# Altium PCB Gate_Driver_SMPS_V2.0_PCB.PcbDoc
Units mm, origin at the board's own origin, x right, y up, seen from the top; angles counter-clockwise.
Board outline 59.05 x 43.56 mm, 2 copper layers (Top Layer, Bottom Layer); 42 components, 33 nets, 133 pads, 20 vias.
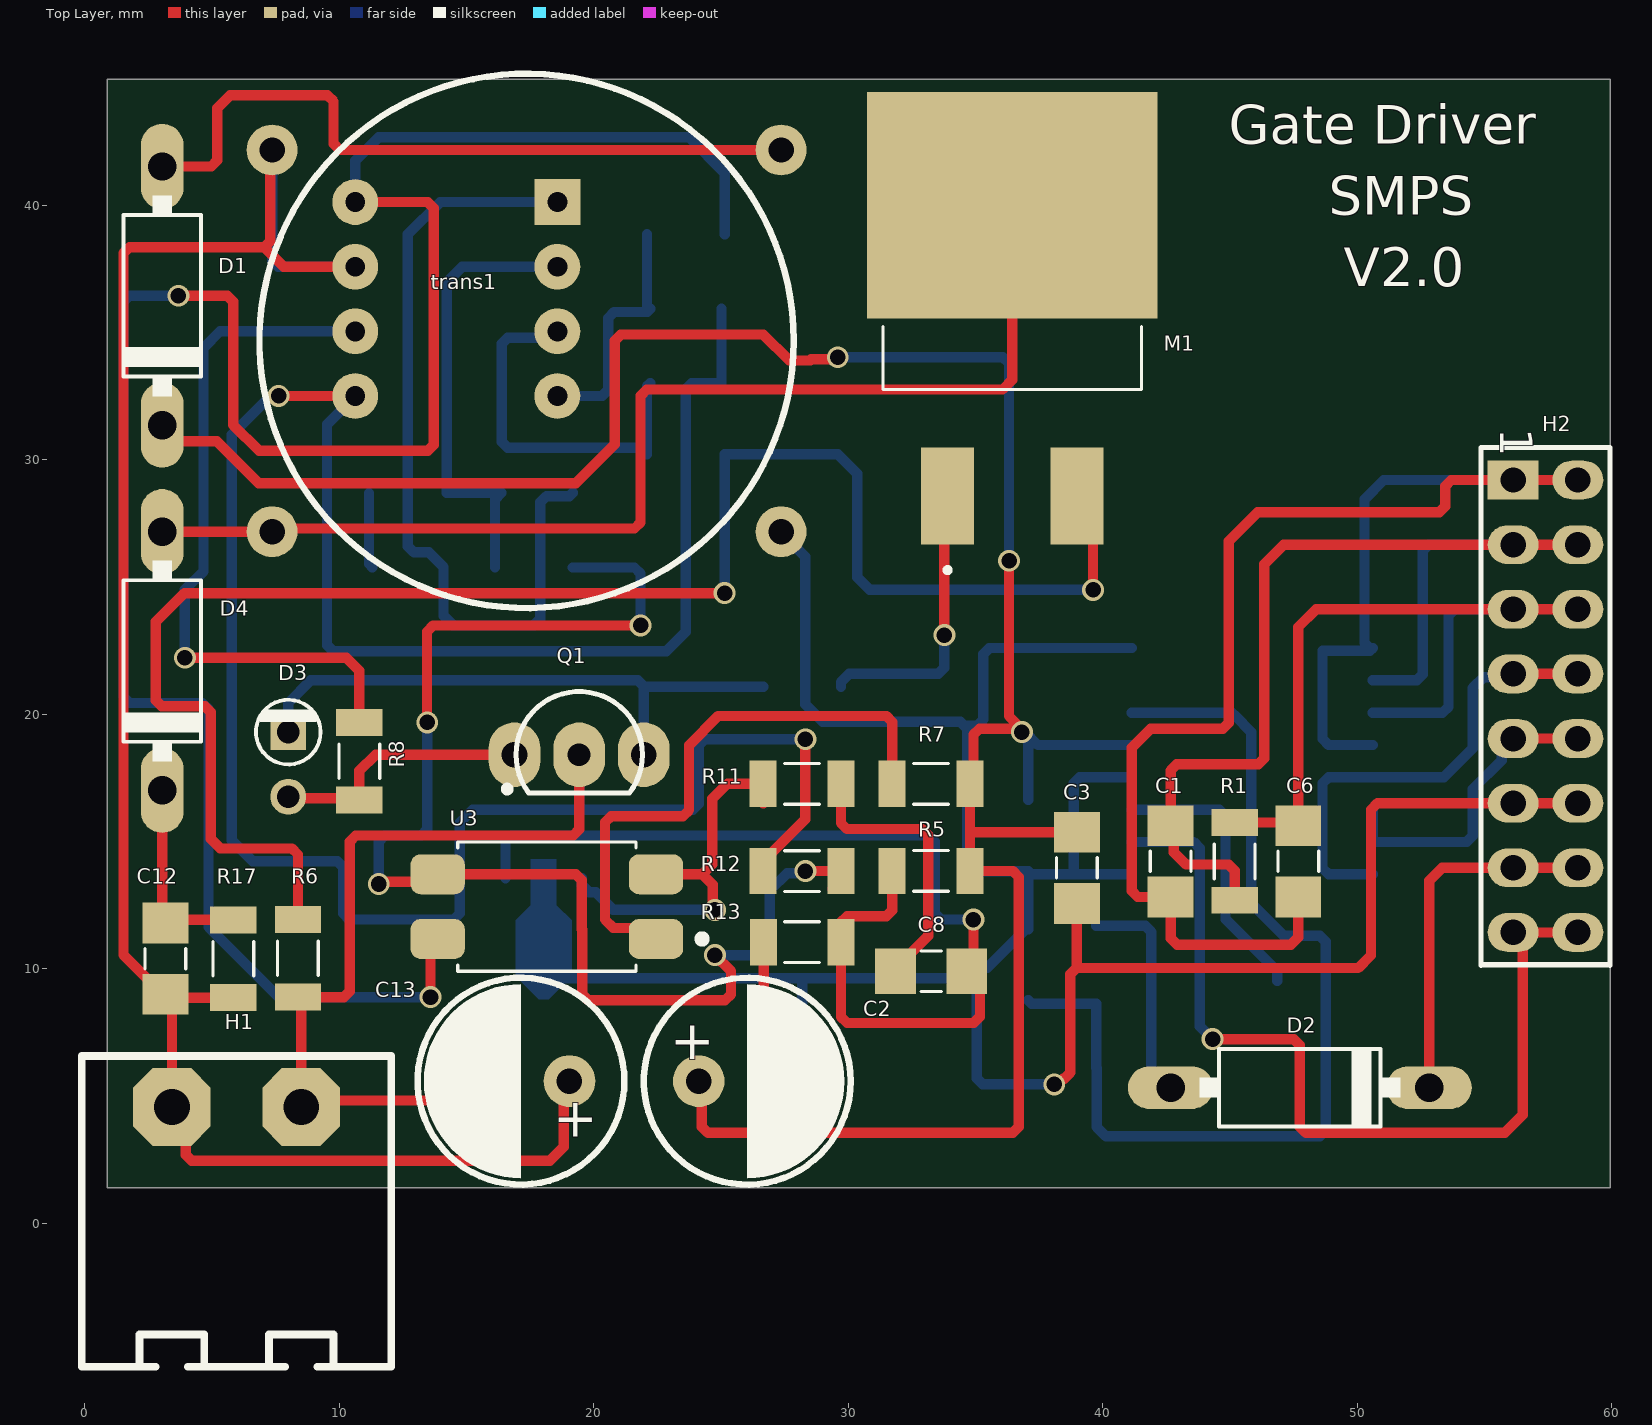
[diagram p0: Top Layer view]
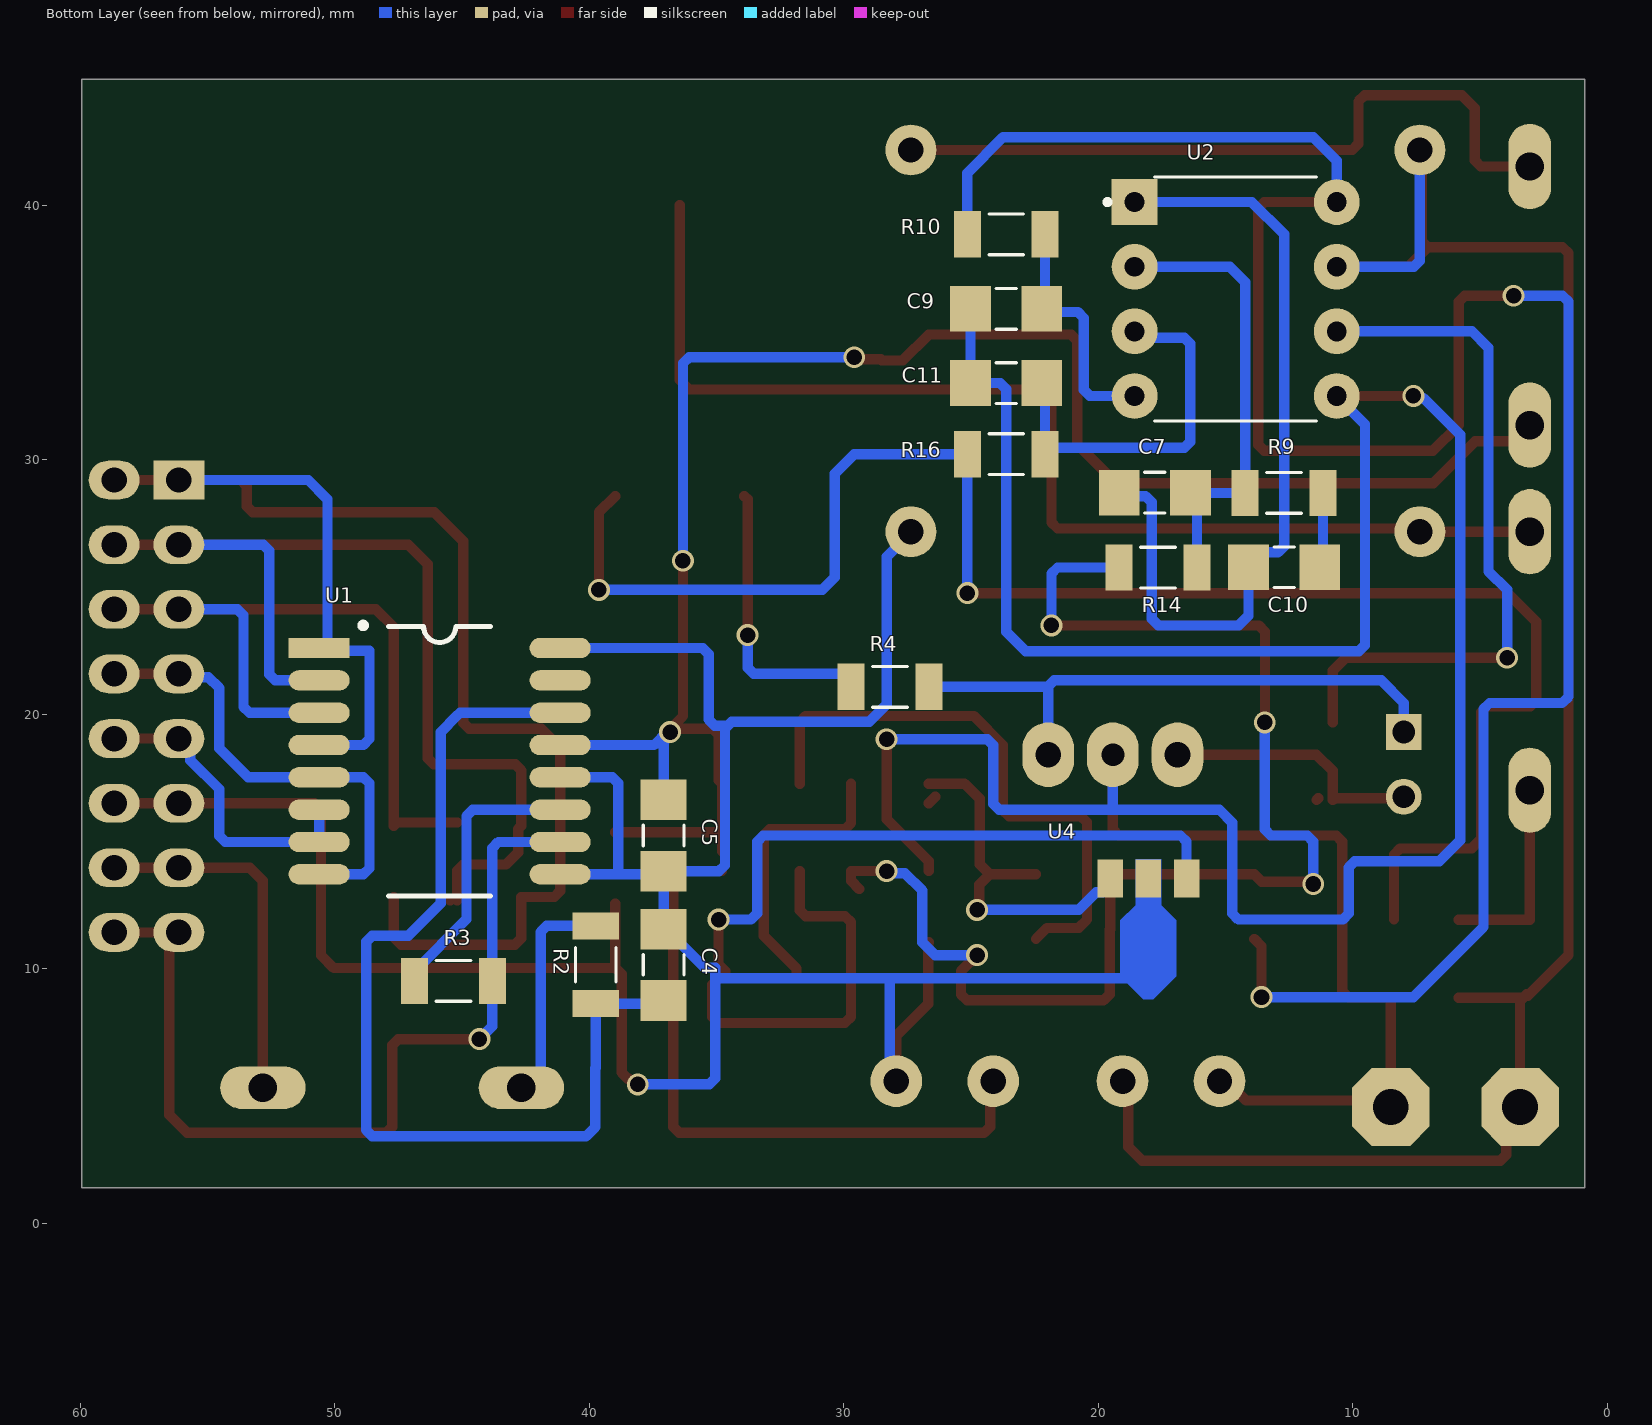
[diagram p1: Bottom Layer view, seen from below]
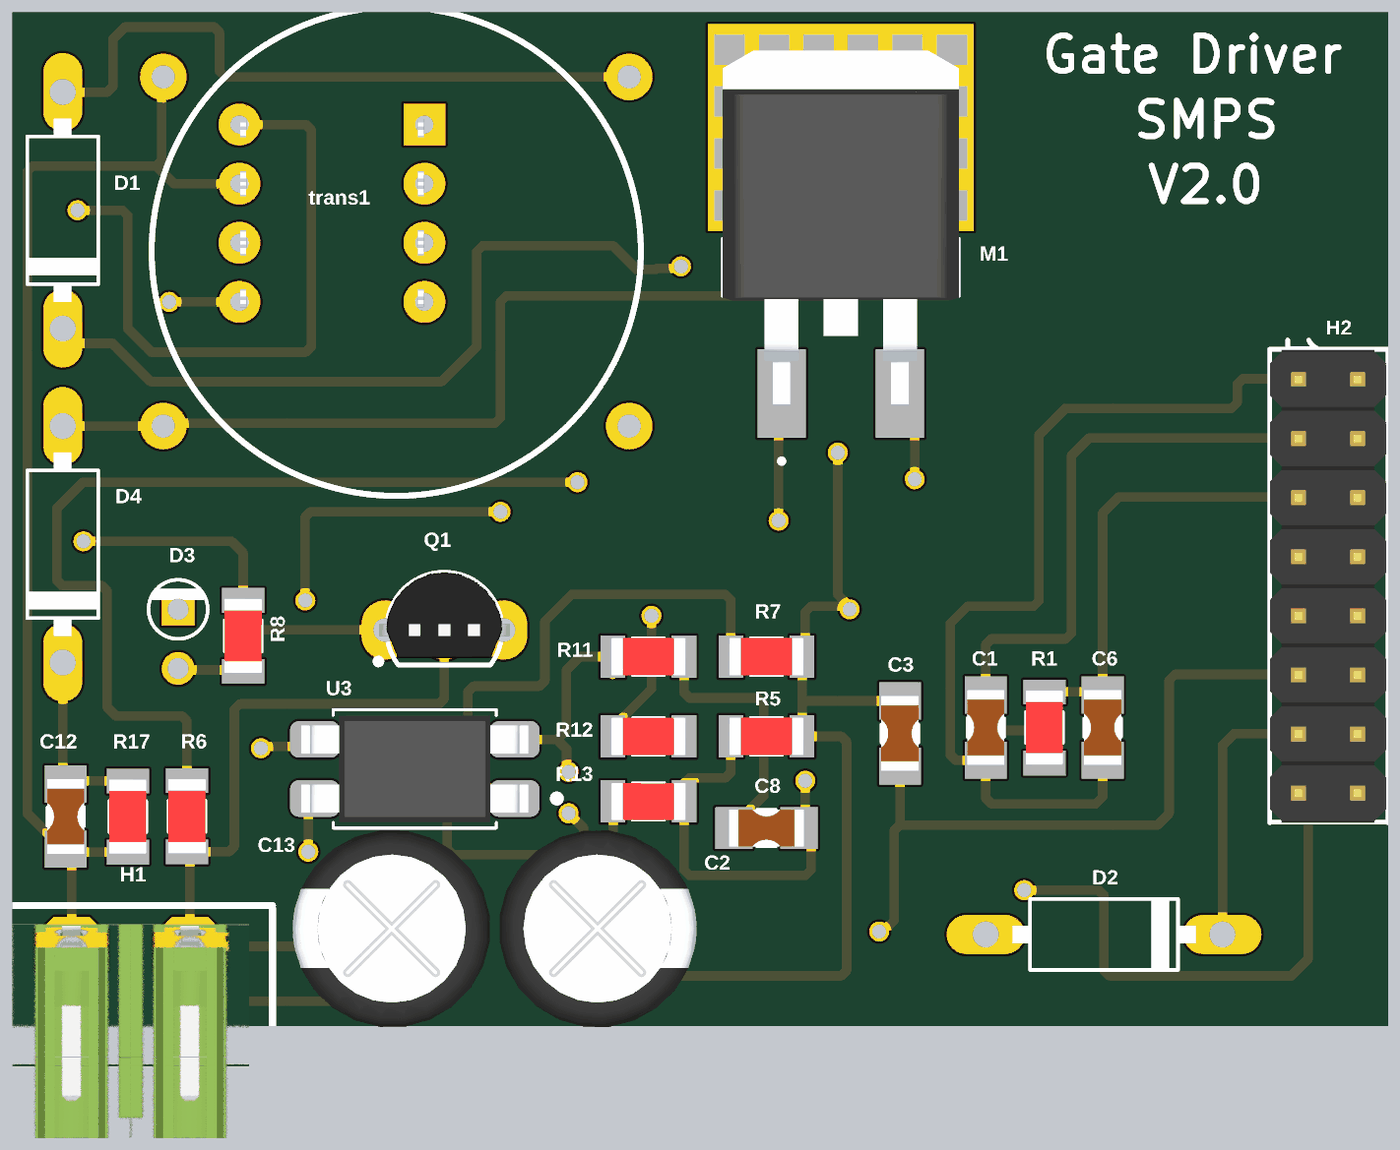
[diagram p2: 3D render of the assembled board from above, using the file's embedded part models]
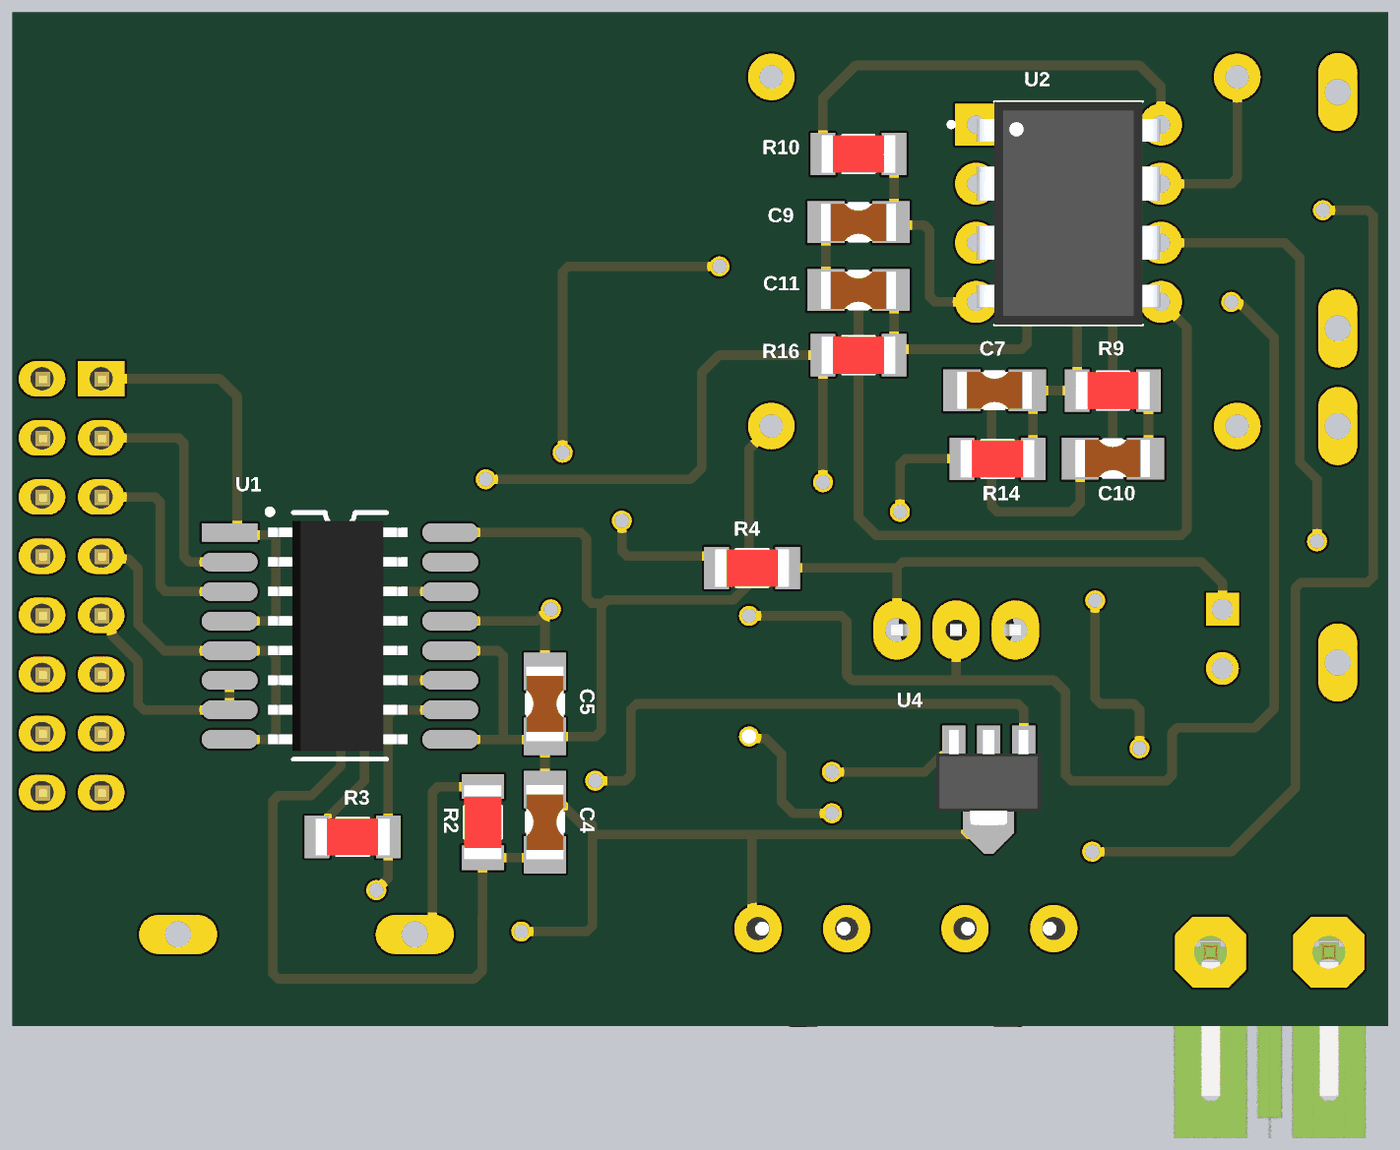
[diagram p3: 3D render of the assembled board from below, using the file's embedded part models]

## Layer stack, top to bottom
Top Solder: solder mask 0.0102, Solder Resist, Dk 3.5
Top Layer: signal copper 0.0356
Dielectric 1: dielectric 0.32, FR-4, Dk 4.8
Bottom Layer: signal copper 0.0356
Bottom Solder: solder mask 0.0102, Solder Resist, Dk 3.5

## Board outline
0.889,1.397 59.944,1.397 59.944,44.958 0.889,44.958

## Design rules (kind name [scope] priority, off if disabled: settings)
Clearance [All] p1: gap=0.254 ignorepadtopadclearanceinfootprint=FALSE except(0: Arc-Hole Track-Hole SMDPad-Hole THPad-Hole Via-Hole Fill-Hole Poly-Hole Region-Hole Text-Hole; 0.1: THPad-THPad; 0.381: Arc-THPad Track-THPad; 0.508: Arc-Arc Arc-Track Track-Track)
HoleSize [All] p1: absolutevalues=TRUE maxlimit=76.2 minlimit=0.3 maxpercent=80.000 minpercent=20.000
HoleToHoleClearance [All] p1: gap=0.025 allowstackedmicrovias=TRUE
PolygonConnect [All] p1: connectstyle=Relief reliefconductorwidth=0.254 reliefentries=4 polygonreliefangle="90 Angle" airgapwidth=0.254
RoutingVias [All] p1: holewidth=0.61 width=0.859 viastyle="Through Hole" minholewidth=0.61 minwidth=0.859 maxholewidth=0.8 maxwidth=0.864
SolderMaskExpansion [All] p1: expansion=0.102 istentingtop=FALSE
Width [All] p1: maxlimit=0.813 minlimit=0.406 preferedwidth=0.508
28 further rules are at their usual default settings.

## Components (designator, comment, footprint, x,y, rotation, side; value= is the part's Value field where it differs from the comment)
C1 "0.1u" CAP_1206 42.672,14.224 r270 top
C2 "470u-50v" CAP-1.5 24.13,5.586 r0 top
C3 "100p" CAP_1206 38.989,13.97 r270 top
C4 "0.1u" CAP_1206 37.084,10.16 r90 bottom
C5 "0.1u" CAP_1206 37.084,15.24 r270 bottom
C6 "1n" CAP_1206 47.691,14.224 r270 top
C7 "10nAC" CAP_1206 17.78,28.712 r0 bottom
C8 "10n" CAP_1206 33.259,9.906 r0 top
C9 "13.6n" CAP_1206 23.622,35.936 r180 bottom
C10 "10nAC" CAP_1206 12.703,25.781 r0 bottom
C11 "100pf" CAP_1206 23.622,33.02 r180 bottom
C12 "3.3n" CAP_1206 3.175,10.399 r270 top
C13 "470u-50v" CAP-1.5 19.05,5.588 r180 top
D1 "BA157-E3/54" P1-10 3.048,36.449 r90 top
D2 "BA157-E3/54" P1-10 47.752,5.334 r180 top
D3 "1N5817" DO41-1 8.001,18.034 r270 top
D4 "BA157-E3/54" P1-10 3.048,22.098 r90 top
H1 "PS-IN" "TB2 - V" 3.429,4.572 r0 top
H2 "H2*8" HDR2X8 56.134,29.21 r270 top
M1 "IRF540N" IRF540N_SMD 36.449,35.56 r90 top
Q1 "B772-PNP" "TO-92A - DUPLICATE" 19.431,18.415 r270 top
R1 "4.7K" RES_1206 45.191,14.224 r270 top
R2 "100" RES_1206 39.751,10.16 r270 bottom
R3 "8.2" RES_1206 45.339,9.525 r180 bottom
R4 "20" RES_1206 28.19,21.082 r180 bottom
R5 "13.5K" RES_1206 33.259,13.848 r0 top
R6 "0.25/4W" RES_1206 8.382,10.414 r90 top
R7 "1K" RES_1206 33.259,17.272 r0 top
R8 "47" RES_1206 10.795,18.161 r90 top
R9 "11.2K" RES_1206 12.703,28.702 r180 bottom
R10 "600-POTENTIO" RES_1206 23.622,38.862 r0 bottom
R11 "16K" RES_1206 28.19,17.272 r0 top
R12 "1K" RES_1206 28.19,13.843 r0 top
R13 "2.5K" RES_1206 28.194,11.049 r0 top
R14 "5.6K" RES_1206 17.653,25.771 r0 bottom
R16 "42K" RES_1206 23.622,30.226 r0 bottom
R17 "510" RES_1206 5.842,10.399 r270 top
trans1 "C055928A" C055928A 7.366,27.178 r0 top
U1 "FOD8332" "SO16 - W" 50.618,22.606 r180 bottom
U2 "UC3843BN" DIP794W45P254L959H508Q8 14.605,36.322 r180 bottom
U3 "PC817" PC816_SMD 18.161,12.446 r180 top
U4 "TL431" VREG_TL431IPK 18.034,11.557 r0 bottom

## Footprints (in the part's own frame and the unit in brackets; to place one, negate y for a bottom-side part, rotate by r counter-clockwise, add the part's x,y. Pads: shape width x height; smd on the part's side, far side on the other; paste and mask are expansions set on the pad)
C055928A [mm]
  round 2 hole 1: 1(0,0) 2(0,15) 3(20,0) 4(20,15)
  silkscreen extent -0.5,-3 20.5,18
CAP-1.5 [mil]
  round 80 hole 39.37: 1(0,0) 2(150,0)
  silkscreen extent -85,-160 235,160, body extent -93,-167 241,167, height 551
CAP_1206 [mm]
  rect 1.6x1.8 smd: 1(-1.4,0) 2(1.4,0)
  silkscreen extent -0.4,-0.8 0.4,0.8, body extent -1.6,-0.8 1.6,0.8, height 1.5
DIP794W45P254L959H508Q8 [mm]
  rect 1.8x1.8 hole 0.78: 1(-3.97,3.81) 1(-3.97,3.81)
  round 1.8 hole 0.78: 2(-3.97,1.27) 2(-3.97,1.27) 3(-3.97,-1.27) 3(-3.97,-1.27) 4(-3.97,-3.81) 4(-3.97,-3.81) 5(3.97,-3.81) 5(3.97,-3.81) 6(3.97,-1.27) 6(3.97,-1.27) 7(3.97,1.27) 7(3.97,1.27) 8(3.97,3.81) 8(3.97,3.81)
  silkscreen extent -5.13,-4.79 3.18,4.79, body extent -3.94,-4.79 3.94,4.79, height 4.58
DO41-1 [mm]
  round 1.408 hole 0.9: A(1.27,0)
  rect 1.408x1.408 hole 0.9: C(-1.27,0)
  silkscreen extent -2.54,-1.27 0,1.27
HDR2X8 [mm] "Connector; Header; 4x2 Position"
  oval 1.524x2 hole 1: 1(0,2.54) 2(2.54,2.54) 2(2.54,0) 3(5.08,2.54) 3(5.08,0) 4(7.62,0) 4(7.62,2.54) 5(10.16,0) 5(10.16,2.54) 6(12.7,0) 6(12.7,2.54) 7(15.24,0) 7(15.24,2.54) 8(17.78,0) 8(17.78,2.54)
  rect 1.524x2 hole 1: 1(0,0)
  silkscreen extent -1.27,-1.27 19.08,3.81, body extent -1.24,-1.27 19.08,3.73, height 8.6
IRF540N_SMD [mm]
  rect 8.89x11.43 smd paste-7: D(4.445,0)
  rect 3.81x2.08 smd: G(-6.985,2.54) S(-6.985,-2.54)
  silkscreen extent -9.99,-5.08 -0.32,5.08, body extent -7.49,-5.08 7.75,5.08, height 4.83
P1-10 [mil]
  oval 132x66 hole 44: A(200,0) C(-200,0)
  silkscreen extent -155,-60 155,60
PC816_SMD [mm]
  rrect50% 2.13x1.57 smd: 1(-4.29,1.27) 2(-4.29,-1.27) 3(4.29,-1.27) 4(4.29,1.27)
  silkscreen extent -6.25,-2.54 3.5,2.54, body extent -4.87,-2.29 4.87,2.29, height 4
RES_1206 [mm]
  rect 1.06x1.82 smd: 1(-1.528,0) 2(1.528,0)
  silkscreen extent -0.68,-0.8 0.68,0.8, body extent -1.6,-0.8 1.6,0.8, height 0.7
"SO16 - W" [mm]
  rect 2.4x0.8 smd: 1(0,0)
  oval 2.4x0.8 smd: 2(0,-1.27) 3(0,-2.54) 4(0,-3.81) 5(0,-5.08) 6(0,-6.35) 7(0,-7.62) 8(0,-8.89) 9(9.47,-8.89) 10(9.47,-7.62) 11(9.47,-6.35) 12(9.47,-5.08) 13(9.47,-3.81) 14(9.47,-2.54) 15(9.47,-1.27) 16(9.47,0)
  silkscreen extent 1.63,-9.74 6.73,0.99, body extent 1.65,-9.39 7.65,0.51, height 1.4
"TB2 - V" [mil] "Terminal Block Vertical"
  oct 120x120 hole 55.12: 1(0,0) 2(200,0)
  silkscreen extent -139,-402 339,79, body extent -100,-315 300,47, height 283
"TO-92A - DUPLICATE" [mil] "TO, Flat Index; 3 In-Line, Axial Leads; Body Dia. 4.5mm; Leads 0.51 x 0.48 mm (max)"
  oval 100x80 hole 40: B(0,-100) E(0,100)
  oval 100x80 hole 35.43: C(0,0)
  silkscreen extent -98,-116 59,98, body extent -98,-110 47,110, height 316
VREG_TL431IPK [mm]
  rect 1x1.5 smd paste-2 mask+0: A(0,-2)
  rect 1x1.5 smd: C(1.5,-2) R(-1.5,-2)
  Top Layer region: 1.1,1.85 1.1,-0.35 0.5,-0.95 0.5,-2.75 -0.5,-2.75 -0.5,-0.95 -1.1,-0.35 -1.1,1.85 -0.2,2.75 0.2,2.75
  body extent -2.25,-2.56 2.25,1.54, height 1.6

## Part data
C1 C2 C3 C4 C5 C6 C13: library part CAP-DC
C7 C8 C9 C10 C11 C12: library part CAP-AC
D1 D2 D4: "Diode 400V 1A Fast Switching DO-204AL", Average Rectified Current=1A, Case/Package=DO-204AL, Forward Voltage=1.3V, Manufacturer="Vishay Semiconductors", Max Operating Temperature=125°C, Max Repetitive Reverse Voltage (Vrrm)=400V, Max Reverse Current=5uA, Max Surge Current=20A, Min Operating Temperature=-65°C, Package Quantity=1, Supplier Part Number 1=625-BA157-E3, ComponentLink1Description=http://www.vishay.com/docs/88536/ba157.pdf?src-supplier=Newark, ComponentLink1URL=http://www.vishay.com/docs/88536/ba157.pdf?src-supplier=Newark, ComponentLink2Description=http://www.vishay.com/docs/88536/ba157.pdf?src-supplier=Avnet, ComponentLink2URL=http://www.vishay.com/docs/88536/ba157.pdf?src-supplier=Avnet, ComponentLink3Description=http://components.arrow.com/part/dataview/42811334S9655183N5680?src-supplier=Arrow+Electronics, ComponentLink3URL=http://components.arrow.com/part/dataview/42811334S9655183N5680?src-supplier=Arrow+Electronics, ComponentLink4Description=http://www.vishay.com/docs/88536/ba157.pdf?src-supplier=Future+Electronics, ComponentLink4URL=http://www.vishay.com/docs/88536/ba157.pdf?src-supplier=Future+Electronics, ComponentLink5Description=http://www.vishay.com/docs/88536/ba157.pdf?src-supplier=Avnet+Europe, ComponentLink5URL=http://www.vishay.com/docs/88536/ba157.pdf?src-supplier=Avnet+Europe, Contact Plating=Tin,Matte, Element Configuration=Single, Forward Current=1A, Lead Free="Lead Free", Manufacturer Part Number=BA157-E3/54, Max Reverse Voltage (DC)=400V, Mount="Through Hole", Number of Pins=2, Packaging="Tape and Reel", Peak Non-Repetitive Surge Current=20A, Pricing 1="1=0.27, 10=0.226, 50=0.226, 100=0.12, 500=0.079, 1000=0.054, 2500=0.043, 5500=0.035, 10000=0.035, 22000=0.033, 49500=0.03 (USD)", Radiation Hardening=No, Recovery Time=150ns, Reverse Recovery Time=150ns, Reverse Recovery Time-Max=150ns, Reverse Voltage=400V, RoHS Compliant=Yes, Stock 1=18564, Supplier 1=Mouser
D3: "Lite-On 1N5817, Schottky Diode, 20V 3A, 2-Pin DO-201AD", Average Rectified Current=3A, Case/Package=DO-201AD, Forward Voltage=850mV, Manufacturer=Vishay, Manufacturer Part Number=1N5820, Max Forward Surge Current (Ifsm)=80A, Max Operating Temperature=125°C, Max Repetitive Reverse Voltage (Vrrm)=20V, Max Reverse Current=150uA, Max Reverse Leakage Current=2mA, Min Operating Temperature=-65°C, Supplier Part Number 1=700-9899, ComponentLink1Description=http://www.liteon-semi.com/download.php?hSFile=1N5820-1N5822-5.pdf&hDFile=tecfile01312524214.pdf&src-supplier=Avnet+Asia, ComponentLink1URL=http://www.liteon-semi.com/download.php?hSFile=1N5820-1N5822-5.pdf&hDFile=tecfile01312524214.pdf&src-supplier=Avnet+Asia, ComponentLink2Description=http://docs-usa.electrocomponents.com/techlib:/itc_doclist_US.htm?stockno=7009899&src-supplier=Allied+Electronics, ComponentLink2URL=http://docs-usa.electrocomponents.com/techlib:/itc_doclist_US.htm?stockno=7009899&src-supplier=Allied+Electronics, Element Configuration=Single, Forward Current=3A, Height=5.3mm, Length=9.5mm, Max Surge Current=80A, Mount="Through Hole", Number of Pins=2, Packaging=Bulk, Peak Non-Repetitive Surge Current=80A, Radiation Hardening=No, RoHS Compliant=No, Stock 1=0, Supplier 1=RSComponents, Width=5.3mm
H1: library part PS-plug
H2: library part "Header 8X2"
M1: "Mosfet, Power; N-ch; Vdss 100V; Rds(on) 44MILLIOHMS; Id 33A; TO-220AB; Pd 130W; -55DEG", Case/Package=TO-220AB, Continuous Drain Current (ID)=33A, Gate to Source Voltage (Vgs)=20V, Manufacturer="International Rectifier", Max Operating Temperature=175°C, Min Operating Temperature=-55°C, Power Dissipation=130W, Supplier Part Number 1=IRF540NPBF-TUBE, ComponentLink1Description=http://www.produktinfo.conrad.com/datenblaetter/150000-174999/162412-da-01-en-IRF_540_N.pdf?src-supplier=Conrad, ComponentLink1URL=http://www.produktinfo.conrad.com/datenblaetter/150000-174999/162412-da-01-en-IRF_540_N.pdf?src-supplier=Conrad, Manufacturer Part Number=IRF540N, Mount="Through Hole", Number of Elements=1, Number of Pins=3, RoHS Compliant=No, Stock 1=0, Supplier 1="Future Electronics"
R1 R2 R3 R4 R5 R6 R7 R8 R9 R10 R11 R12 R13 R14 R16 R17: library part RES
trans1: library part "flyback trans"
U1: library part TLP5214A
U2: "IC REG CTRLR BST/FLYBK 8-MINIDIP", Case/Package=PDIP, Frequency=250kHz, Manufacturer=STMicroelectronics, Max Frequency=500kHz, Max Operating Temperature=150°C, Max Power Dissipation=800mW, Max Supply Current=17mA, Max Supply Voltage=30V, Min Operating Temperature=-40°C, Min Supply Voltage=12V, Output Current=1A, Output Voltage=5.1V, Package Quantity=50, ComponentLink1Description=http://www.st.com/content/ccc/resource/technical/document/datasheet/b6/e8/cc/ba/4f/cd/42/9b/CD00000966.pdf/files/CD00000966.pdf/jcr:content/translations/en.CD00000966.pdf?src-supplier=Digi-Key, ComponentLink1URL=http://www.st.com/content/ccc/resource/technical/document/datasheet/b6/e8/cc/ba/4f/cd/42/9b/CD00000966.pdf/files/CD00000966.pdf/jcr:content/translations/en.CD00000966.pdf?src-supplier=Digi-Key, ComponentLink2Description=http://www.mouser.com/ds/2/389/uc2842b-974450.pdf?src-supplier=Mouser, ComponentLink2URL=http://www.mouser.com/ds/2/389/uc2842b-974450.pdf?src-supplier=Mouser, ComponentLink3Description=http://www.st.com/web/en/resource/technical/document/datasheet/CD00000966.pdf?src-supplier=Avnet, ComponentLink3URL=http://www.st.com/web/en/resource/technical/document/datasheet/CD00000966.pdf?src-supplier=Avnet, ComponentLink4Description=http://www.st.com/web/en/resource/technical/document/datasheet/CD00000966.pdf?src-supplier=Future+Electronics, ComponentLink4URL=http://www.st.com/web/en/resource/technical/document/datasheet/CD00000966.pdf?src-supplier=Future+Electronics, ComponentLink5Description=https://www.verical.com/server-webapp/html/getDatasheet?partID=66041&src-supplier=Verical, ComponentLink5URL=https://www.verical.com/server-webapp/html/getDatasheet?partID=66041&src-supplier=Verical, ComponentLink6Description=http://www.produktinfo.conrad.com/datenblaetter/1100000-1199999/001185662-da-01-en-IC_REG_CTRLR_PWM_CM_UC3843BN_DIP_8_STM.pdf?src-supplier=Conrad, ComponentLink6URL=http://www.produktinfo.conrad.com/datenblaetter/1100000-1199999/001185662-da-01-en-IC_REG_CTRLR_PWM_CM_UC3843BN_DIP_8_STM.pdf?src-supplier=Conrad, Duty Cycle=100%, Fall Time=50ns, Height=3.32mm, Lead Free="Lead Free", Length=10.92mm, Manufacturer Part Number=UC3843BN, Max Duty Cycle=100%, Mount="Through Hole", Number of Outputs=1, Number of Pins=8, Packaging=Rail/Tube, Power Dissipation=800mW, Pricing 1="1=0.9063, 10=0.7523, 25=0.7389, 100=0.6172, 250=0.5737, 500=0.4903, 1000=0.3493, 4000=0.3129, 5000=0.3123, 6000=0.3104, 8000=0.3085, 10000=0.3066, 20000=0.3047, 25000=0.3027, 30000=0.3008, 50000=0.2988 (USD)", Radiation Hardening=No, REACH SVHC="No SVHC", Rise Time=50ns, RoHS Compliant=Yes, Series=-, Stock 1=669, Supplier 1="Arrow Electronics", Supplier Part Number 1=UC3843BN, Switching Frequency=500kHz, Topology=Boost,Flyback, Weight=0.032805oz, Width=6.6mm
U3: "Optocoupler DC-IN 1-CH Transistor DC-OUT 4-Pin PDIP Sleeve", Case/Package=PDIP, Collector Emitter Saturation Voltage=200mV, Collector Emitter Voltage (VCEO)=35V, Current Transfer Ratio=600%, Forward Current=50mA, Forward Voltage=1.4V, Manufacturer=Sharp, Max Operating Temperature=100°C, Min Operating Temperature=-30°C, Power Dissipation=200mW, Reverse Breakdown Voltage=6V, Fall Time=18000ns, Input Type=DC, Manufacturer Part Number=PC817, Mount="Through Hole", Number of Elements=1, Number of Pins=4, Packaging=Sleeve, Rise Time=18000ns, RoHS Compliant=No, Stock 1=0, Supplier 1="Arrow Electronics", Supplier Part Number 1=PC817
U4: library part TL431CZ, "V-Ref Adjustable 2.495V to 36V 100mA 3-Pin TO-92 Bulk", Case/Package=TO-92, Cathode Current=1mA, Manufacturer=STMicroelectronics, Max Input Voltage=37V, Max Operating Temperature=70°C, Max Output Current=100mA, Max Output Voltage=36V, Min Operating Temperature=0°C, Min Output Voltage=2.495V, Package Quantity=1, Temperature Coefficient=100ppm/°C, Tolerance=2.21%, Accuracy=2%, ComponentLink1Description=http://www.st.com/web/en/resource/technical/document/datasheet/CD00000986.pdf?src-supplier=Digi-Key, ComponentLink1URL=http://www.st.com/web/en/resource/technical/document/datasheet/CD00000986.pdf?src-supplier=Digi-Key, ComponentLink2Description=http://www.st.com/content/ccc/resource/technical/document/datasheet/2d/27/af/41/03/e2/44/8e/CD00000986.pdf/files/CD00000986.pdf/jcr:content/translations/en.CD00000986.pdf?src-supplier=Digi-Key, ComponentLink2URL=http://www.st.com/content/ccc/resource/technical/document/datasheet/2d/27/af/41/03/e2/44/8e/CD00000986.pdf/files/CD00000986.pdf/jcr:content/translations/en.CD00000986.pdf?src-supplier=Digi-Key, ComponentLink3Description=http://www.farnell.com/datasheets/1690313.pdf?src-supplier=Element14, ComponentLink3URL=http://www.farnell.com/datasheets/1690313.pdf?src-supplier=Element14, ComponentLink4Description=http://www.rapidonline.com/pdf/82-0290.pdf?src-supplier=Rapid+Electronics, ComponentLink4URL=http://www.rapidonline.com/pdf/82-0290.pdf?src-supplier=Rapid+Electronics, ComponentLink5Description=https://www.verical.com/server-webapp/html/getDatasheet?partID=98639&src-supplier=Verical, ComponentLink5URL=https://www.verical.com/server-webapp/html/getDatasheet?partID=98639&src-supplier=Verical, ComponentLink6Description=http://www.produktinfo.conrad.com/datenblaetter/150000-174999/155641-da-01-en-SPG_REF_TL431CZ_STM.pdf?src-supplier=Conrad, ComponentLink6URL=http://www.produktinfo.conrad.com/datenblaetter/150000-174999/155641-da-01-en-SPG_REF_TL431CZ_STM.pdf?src-supplier=Conrad, Height=4.4mm, Lead Free="Lead Free", Length=4.7mm, Manufacturer Part Number=TL431CZ, Mount="Through Hole", Nominal Supply Current=1mA, Number of Channels=1, Number of Pins=3, Output Current=100mA, Output Type=Adjustable, Output Voltage=36V, Packaging=Bulk, Pricing 1="1=0.4405, 10=0.3422, 100=0.2291, 500=0.1883, 1000=0.1722, 2500=0.1137, 10000=0.083, 1=0.3921, 10=0.3046, 100=0.2039, 500=0.1676, 1000=0.1299, 2500=0.1012, 10000=0.0723 (USD)", Radiation Hardening=No, REACH SVHC="No SVHC", Reference Type=Shunt,Adjustable, Reference Voltage=36V, RoHS Compliant=Yes, Series=-, Stock 1=5333, Supplier 1="Arrow Electronics", Supplier Part Number 1=TL431CZ, Supply Current=1mA, Weight=0.01lb, Width=3.7mm

## Via types
v1: diameter 0.859, hole 0.61, Top Layer to Bottom Layer, 20 vias

## Nets (pads, with @x,y where several pads share a name; then routed paths per layer and width w, separated by ;. In a path a pad name is that pad's centre, name@x,y a point inside that pad or via, vN(x,y) a via of type N, cw(c..) or ccw(c..) an arc to the next point about the centre after c; other vN are vias at no path point)
C: D2.C H2.7 | length 14.2
  Top Layer w0.406: D2.C 52.832,13.462 53.34,13.97 56.134,13.97 H2.7@58.674,13.97
F: C6.1 H2.3 R1.1 U1.3 | length 30.9
  Top Layer w0.406: R1.1 47.563,15.752 C6.1 47.691,23.434 48.387,24.13 56.134,24.13 H2.3@58.674,24.13
  Bottom Layer w0.406: U1.3 53.356,20.066 53.594,20.304 53.594,23.892 53.832,24.13 H2.3@56.134,24.13
G: H2.8 R3.2 U1.10 | length 36.2
  Top Layer w0.406: v1(44.323,7.239) 47.514,7.239 47.752,7.001 47.752,3.794 47.99,3.556 55.797,3.556 56.515,4.274 56.515,11.049 56.134,11.43 H2.8@58.674,11.43
  Bottom Layer w0.406: U1.10 43.573,14.986 43.811,14.748 R3.2 43.811,7.751 v1(44.323,7.239)
GNDK: H2.4 U1.5 U1.8 | length 18.7
  Top Layer w0.406: H2.4@56.134,21.59 H2.4@58.674,21.59
  Bottom Layer w0.406: U1.8 48.879,13.716 48.641,13.954 48.641,17.288 48.879,17.526 U1.5 53.414,17.526 54.55,18.662 54.55,21.038 54.975,21.463 56.007,21.463 56.134,21.59 H2.4@56.077,21.59
Isns: M1.S R6.2 R16.2 | length 67.9
  Top Layer w0.406: R6.2 8.382,14.494 8.144,14.732 5.334,14.732 4.953,15.113 4.953,20.082 4.715,20.32 3.032,20.32 2.794,20.558 2.794,23.638 3.921,24.765 v1(25.146,24.765) ; M1.S 39.624,27.94 v1(39.624,24.892)
  Bottom Layer w0.406: v1(25.146,24.765) 25.148,24.767 25.148,30.224 R16.2 29.591,30.226 30.353,29.464 30.353,25.384 30.845,24.892 v1(39.624,24.892)
NetC4_1: C4.1 R2.2 U1.14 | length 39.5
  Bottom Layer w0.406: C4.1 37.212,8.632 R2.2 39.751,6.119 39.776,6.094 39.776,3.785 40.132,3.429 48.53,3.429 48.768,3.667 48.768,11.065 48.53,11.303 47.117,11.303 45.847,12.573 45.847,19.304 45.212,19.939 45.085,20.066 U1.14
NetC7_1: C7.1 R9.1 R14.1 U2.2 | length 18.1
  Bottom Layer w0.406: R14.1 16.125,28.457 C7.1@16.37,28.702 ; C7.1 C7.1@16.37,28.702 ; U2.2@18.575,37.592 14.843,37.592 14.231,36.98 R9.1 C7.1@16.37,28.702
NetC7_2: C7.2 C10.2 U2.1 | length 32.4
  Bottom Layer w0.406: U2.1@18.575,40.132 13.97,40.132 12.7,38.862 12.7,26.603 12.938,26.365 13.519,26.365 C10.2 14.103,23.87 14.478,23.495 17.653,23.495 17.907,23.749 17.907,28.337 18.145,28.575 19.043,28.575 C7.2
NetC8_1: C8.1 R11.2 | length 11
  Top Layer w0.406: R11.2 29.718,15.732 29.956,15.494 32.909,15.494 33.147,15.256 33.147,11.294 31.859,10.006 C8.1
NetC8_2: C8.2 R5.1 R13.2 U4.R | length 40.2
  Top Layer w0.406: R5.1 31.731,12.303 31.493,12.065 29.956,12.065 29.718,11.827 29.718,9.906 29.718,8.112 29.956,7.874 34.941,7.874 35.179,8.112 35.179,9.386 C8.2 34.925,10.172 v1(34.925,11.938)
  Bottom Layer w0.406: U4.R 16.534,15.002 16.772,15.24 33.163,15.24 33.401,15.002 33.401,12.192 33.655,11.938 v1(34.925,11.938)
NetC9_2: C9.2 R10.1 U2.4 | length 9.7
  Bottom Layer w0.406: U2.4@18.575,32.512 20.336,32.512 20.574,32.75 20.574,35.576 20.812,35.814 22.1,35.814 C9.2 22.094,36.064 R10.1
NetC10_1: C10.1 R9.2 | length 3
  Bottom Layer w0.406: R9.2 11.175,25.909 C10.1
NetC11_2: C11.2 R16.1 U2.3 | length 15
  Bottom Layer w0.406: U2.3@18.575,35.052 18.321,34.798 16.621,34.798 16.383,34.56 16.383,30.718 16.621,30.48 21.84,30.48 R16.1 22.094,32.892 C11.2
NetC12_1: C12.1 D4.C R17.1 | length 7.9
  Top Layer w0.406: D4.C 3.048,11.926 3.049,11.927 R17.1
NetD1_A: D1.A trans1.4 | length 28.5
  Top Layer w0.406: D1.A 4.969,41.529 5.207,41.767 5.207,43.815 5.715,44.323 9.541,44.323 9.779,44.085 9.779,42.416 10.017,42.178 trans1.4
NetD2_A: D2.A R2.1 | length 8.8
  Bottom Layer w0.406: R2.1 41.672,11.688 41.91,11.45 41.91,5.921 42.497,5.334 D2.A
NetD3_A: D3.A Q1.B R8.1 | length 10.4
  Top Layer w0.406: D3.A 8.066,16.699 10.729,16.699 R8.1 10.795,17.78 11.43,18.415 12.319,18.415 Q1.B ; R8.1@11.364,16.699 R8.1@11.43,16.633
NetD3_C: D3.C Q1.E R4.2 | length 23.7
  Bottom Layer w0.406: D3.C@8.502,18.803 D3.C 8.001,20.447 8.89,21.336 21.733,21.336 21.971,21.098 ; Q1.E 21.971,21.098 ; R4.2 21.987,21.082 21.971,21.098
NetD4_A: D4.A M1.D trans1.1 | length 45.7
  Top Layer w0.406: D4.A trans1.1 7.493,27.305 21.606,27.305 21.844,27.543 21.844,32.528 22.082,32.766 36.068,32.766 36.449,33.147 M1.D
NetM1_G: M1.G R4.1 | length 11.3
  Top Layer w0.406: v1(33.782,23.114) 33.782,28.448 M1.G
  Bottom Layer w0.406: R4.1 29.718,21.263 30.045,21.59 33.544,21.59 33.782,21.828 v1(33.782,23.114)
NetR3_1: R3.1 U1.11 | length 11.1
  Bottom Layer w0.406: U1.11 44.577,16.256 44.831,16.002 44.831,11.941 46.867,9.905 R3.1
NetR7_1: R7.1 U3.1 | length 23.2
  Top Layer w0.406: U3.1 22.018,11.609 20.776,11.609 20.447,11.938 20.447,15.764 20.685,16.002 23.511,16.002 23.749,16.24 23.749,18.796 24.892,19.939 31.493,19.939 31.731,19.701 R7.1
NetR11_1: R11.1 U3.2 U4.C | length 15
  Top Layer w0.406: U3.2 24.273,13.716 ; v1(24.765,12.319) 24.678,12.406 24.678,13.31 24.273,13.716 ; R11.1@26.408,16.764 R11.1@26.662,16.51 ; R11.1 25.257,17.272 24.663,16.678 24.663,14.106 24.273,13.716
  Bottom Layer w0.406: U4.C 19.534,13.307 19.831,13.01 20.081,13.01 20.772,12.319 v1(24.765,12.319)
PGND: C9.1 C11.1 C13.2 H1.2 Q1.C R6.1 R12.1 U2.5 | length 131.1
  Top Layer w0.406: v1(7.62,32.512) U2.5@10.635,32.512 ; C13.2 14.951,5.588 14.189,4.826 8.763,4.826 H1.2 8.509,8.759 R6.1 10.176,8.886 10.414,9.124 10.414,15.002 10.652,15.24 19.193,15.24 19.431,15.478 Q1.C ; R12.1 26.662,14.223 28.321,15.882 v1(28.321,19.025)
  Bottom Layer w0.406: v1(7.62,32.512) 7.533,32.425 7.222,32.425 5.782,30.985 5.782,15.046 6.604,14.224 9.922,14.224 10.16,13.986 10.16,12.176 10.398,11.938 14.494,11.938 14.732,12.176 14.732,15.748 15.24,16.256 19.431,16.256 ; U2.5@10.635,32.512 9.525,31.402 9.525,22.717 9.763,22.479 22.86,22.479 23.622,23.241 23.622,32.782 23.86,33.02 C11.1 C9.1 ; Q1.C 19.431,16.256 ; v1(28.321,19.025) 24.368,19.025 24.13,18.787 24.13,16.494 23.892,16.256 19.431,16.256
PMW: H2.5 U1.6 U1.7 | length 12.3
  Top Layer w0.406: H2.5@56.134,19.05 H2.5@58.674,19.05
  Bottom Layer w0.406: U1.6 U1.7 54.312,14.986 54.55,15.224 54.55,17.068 55.682,18.2 55.682,18.598 H2.5@56.134,19.05
pwm: R8.2 U2.6 | length 27.8
  Top Layer w0.406: v1(3.937,22.225) 10.287,22.225 10.795,21.717 R8.2
  Bottom Layer w0.406: v1(3.937,22.225) 3.937,24.892 4.671,25.626 4.671,34.405 5.318,35.052 U2.6@10.635,35.052
SGND: C2.2 C3.2 C4.2 C5.2 H2.6 R13.1 trans1.3 U1.9 U1.12 U1.16 U4.A | length 118.2
  Top Layer w0.406: R13.1 26.682,11.033 26.682,8.624 27.94,7.366 C2.2 ; v1(38.1,5.461) 38.222,5.461 38.448,5.687 38.497,5.687 38.735,5.925 38.735,9.795 38.973,10.033 ; C3.2 38.989,10.049 38.973,10.033 ; H2.6@58.674,16.51 56.134,16.51 50.8,16.51 50.546,16.256 50.546,10.541 50.038,10.033 38.973,10.033
  Bottom Layer w0.406: U4.A 18.034,9.906 18.313,9.627 28.194,9.627 ; trans1.3 27.366,27.148 28.321,26.193 28.321,20.392 28.999,19.715 34.403,19.715 34.56,19.558 ; C2.2@27.813,5.334 28.194,5.715 28.194,9.627 ; v1(38.1,5.461) 35.29,5.461 35.052,5.699 35.052,9.627 ; U1.9 38.862,13.716 ; U1.12 39.1,17.526 38.862,17.288 38.862,13.716 ; U1.16 35.544,22.606 35.306,22.368 35.306,19.796 35.068,19.558 34.56,19.558 ; 28.194,9.627 35.052,9.627 ; 34.56,19.558 34.671,19.447 34.671,14.078 34.909,13.84 C5.2 ; 35.052,9.627 35.052,10.049 35.473,10.049 36.984,11.56 C4.2 C5.2 ; C5.2 37.208,13.716 38.862,13.716
uGND: C1.2 C6.2 H2.1 U1.1 U1.4 | length 62
  Top Layer w0.406: C6.2 47.691,11.242 47.396,10.947 42.926,10.947 42.672,11.201 C1.2 41.386,12.824 41.148,13.062 41.148,18.685 41.894,19.431 44.72,19.431 44.958,19.669 44.958,26.797 46.101,27.94 53.229,27.94 53.467,28.178 53.467,28.972 53.705,29.21 56.134,29.21 H2.1@58.674,29.21
  Bottom Layer w0.406: U1.4 48.879,18.796 48.641,19.034 48.641,22.495 50.507,22.495 U1.1 50.489,22.606 50.292,22.803 50.292,28.448 51.054,29.21 H2.1@56.134,29.21
VCC: C1.1 H2.2 R1.2 U1.2 | length 41.9
  Top Layer w0.406: R1.2 45.191,13.861 44.953,14.099 43.289,14.099 42.799,14.589 42.799,15.497 C1.1 42.672,17.796 42.91,18.034 46.117,18.034 46.355,18.272 46.355,25.908 47.117,26.67 56.134,26.67 H2.2@58.674,26.67 ; R1.2@45.456,12.706 R1.2@45.466,12.696
  Bottom Layer w0.406: U1.2 52.34,21.336 52.578,21.574 52.578,26.432 52.816,26.67 H2.2@56.134,26.67
Vfb: R12.2 R14.2 U3.3 | length 54
  Top Layer w0.406: v1(11.557,13.335) 11.644,13.422 13.577,13.422 U3.3 19.295,13.716 19.533,13.478 19.533,11.559 19.558,11.534 19.558,9.001 19.796,8.763 25.162,8.763 25.4,9.001 25.4,9.906 v1(24.765,10.541) ; v1(13.462,19.685) 13.453,19.694 13.453,23.257 13.691,23.495 v1(21.844,23.495) ; v1(28.321,13.843) R12.2 29.718,13.463 R12.2@29.391,13.136
  Bottom Layer w0.406: v1(11.557,13.335) 11.557,15.002 11.795,15.24 13.224,15.24 13.462,15.478 v1(13.462,19.685) ; R14.2 21.606,25.771 21.844,25.533 v1(21.844,23.495) ; v1(24.765,10.541) 26.416,10.541 26.924,11.049 26.924,13.081 27.599,13.756 28.234,13.756 v1(28.321,13.843) v1@28.067,13.843
Vin: C12.2 C13.1 H1.1 R17.2 trans1.2 U2.7 | length 78
  Top Layer w0.406: C12.2@3.125,8.949 1.524,10.55 1.524,38.116 1.762,38.354 7.056,38.354 ; C12.2 C12.2@3.303,8.871 ; R17.2 C12.2@3.303,8.871 ; trans1.2 7.294,42.106 7.294,38.592 7.056,38.354 ; U2.7@10.635,37.592 7.818,37.592 7.056,38.354 ; C13.1 18.821,5.359 18.821,3.016 18.269,2.464 4.208,2.464 3.97,2.702 3.97,4.031 H1.1 3.429,8.745 C12.2@3.303,8.871
  Bottom Layer w0.406: trans1.2 7.366,37.83 7.604,37.592 U2.7@10.635,37.592
Voiso: C2.1 C3.1 C5.1 D1.C R5.2 R7.2 U1.13 | length 98.9
  Top Layer w0.406: D1.C 3.048,31.321 3.635,30.734 5.184,30.734 6.835,29.083 19.304,29.083 20.828,30.607 20.828,34.687 21.066,34.925 26.67,34.925 27.686,33.909 28.514,33.909 28.554,33.949 29.504,33.949 v1(29.591,34.036) ; C2.1 24.254,5.462 24.254,3.794 24.492,3.556 36.465,3.556 36.703,3.794 36.703,13.61 36.465,13.848 R5.2 ; R5.2@34.787,14.61 34.787,15.367 ; v1(36.322,26.035) 36.322,19.934 36.83,19.426 v1(36.83,19.304) 36.703,19.431 35.163,19.431 34.925,19.193 34.925,17.41 R7.2 34.787,15.367 ; C3.1 34.79,15.37 34.787,15.367
  Bottom Layer w0.406: v1(29.591,34.036) 36.084,34.036 36.322,33.798 v1(36.322,26.035) ; C5.1 37.084,18.928 36.83,19.182 v1(36.83,19.304) 36.952,19.304 37.46,18.796 U1.13
Vref: R10.2 U2.8 U3.4 | length 89.6
  Top Layer w0.406: v1(3.683,36.449) 5.604,36.449 5.842,36.211 5.842,31.369 6.858,30.353 13.478,30.353 13.716,30.591 13.716,39.894 13.478,40.132 U2.8@10.635,40.132 ; v1(13.589,8.89) 13.589,10.894 U3.4
  Bottom Layer w0.406: v1(3.683,36.449) 1.762,36.449 1.524,36.211 1.524,20.701 1.778,20.447 4.629,20.447 4.867,20.209 4.867,11.643 7.62,8.89 v1(13.589,8.89) ; U2.8@10.635,40.132 10.635,41.75 11.557,42.672 23.749,42.672 25.15,41.271 R10.2
pads on no net: U1.15

## Silkscreen, mask and mechanical layers (free items; w line width, h text height)
Top Overlay:
  text "Gate Driver" at 44.948,42.418 h1.52
  text "SMPS" at 48.895,39.624 h1.52
  text "V2.0" at 49.483,36.83 h1.52

## Text inside footprints (layer, text, board x,y; h text height)
C2: Top Overlay "+" at 23.012,6.449 h1.52; Mechanical 29 "+" at 23.012,6.449 h1.52
C13: Top Overlay "+" at 20.168,4.724 h1.52 r180; Mechanical 29 "+" at 20.168,4.724 h1.52 r180
H2: Top Overlay "1" at 55.626,31.242 h1.27 r270